# EAGLE board dual-verter (EAGLE 7.7.0)

Size 100 x 16.5 mm. Coordinates in mm from the lower left corner, seen from the top.
Outline: 0,0 100,0 100,16.5 0,16.5 0,0
Copper layers (1*16): Top 0.035mm / dielectric 1.5mm / Bottom 0.035mm
Design rules "default": minimum track width 10mil, minimum drill 24mil, track to track 8mil, track to pad 8mil, pad to pad 8mil, via to via 8mil, smd to smd 8mil, copper to edge 40mil, drill to drill 8mil, minimum pad ring 10mil, minimum via ring 8mil, stop-mask expansion 4mil, vias tented up to drill 0mil, thermal gap 10mil

## Footprints (pad centres in the part's own frame; a part is rotated, then mirrored left to right if it is on the bottom)
C0805 = smd 1.3 x 1.5: 1 -0.95,0; 2 0.95,0
SOD323-W = smd 1.5 x 1.2: A 1.45,0; C -1.45,0
SO08 = smd 0.6 x 2.2: 1 -1.905,-2.6; 2 -0.635,-2.6; 3 0.635,-2.6; 4 1.905,-2.6; 5 1.905,2.6; 6 0.635,2.6; 7 -0.635,2.6; 8 -1.905,2.6
WQP-PJ301M-12_JACK = drill 1.1: P$1_TIP 0,5; P$2_SWITCH 0,-3.5; P$3_SLEEVE 0,-6.5
POWER_10 = drill 1.016 pad 1.88 octagon: 1 -5.08,-1.27; 2 -5.08,1.27; 3 -2.54,-1.27; 4 -2.54,1.27; 5 0,-1.27; 6 0,1.27; 7 2.54,-1.27; 8 2.54,1.27; 9 5.08,-1.27; 10 5.08,1.27
R0805 = smd 1.3 x 1.5: 1 -0.95,0; 2 0.95,0
9MM_SNAP-IN_POT = drill 1.1 square: 1 -2.5,-7 | drill 1.1 octagon: 2 0,-7; 3 2.5,-7 | drill 2.1 pad 2.794: CHASSIS1 -4.5,0; CHASSIS2 4.5,0

## Placement (x,y rotation side)
C1  10u  [C0805]  90.17,2.54 0 bottom
C2  0.1u  [C0805]  90.17,6.35 0 bottom
C3  0.1u  [C0805]  90.17,10.16 180 bottom
C4  10u  [C0805]  90.17,13.97 180 bottom
D1  BAT54  [SOD323-W]  89.25,4.4 90 top
D2  BAT54  [SOD323-W]  89.44,12.09 90 top
IC1  TL072D  [SO08]  45.09,8.26 0 bottom
IN1  THONKICONNNEW  [WQP-PJ301M-12_JACK]  82.56,8.01 0 top
IN2  THONKICONNNEW  [WQP-PJ301M-12_JACK]  35.59,8.01 0 top
OUT1  THONKICONNNEW  [WQP-PJ301M-12_JACK]  54.62,8.01 0 top
OUT2  THONKICONNNEW  [WQP-PJ301M-12_JACK]  8.28,8.01 0 top
POWER1  POWER_SIMPLE10  [POWER_10]  96.52,8.26 270 bottom
R1  200k  [R0805]  36.2,8.26 90 bottom
R2  200k  [R0805]  41.91,14.61 180 bottom
R3  200k  [R0805]  45.09,1.91 180 bottom
R4  200k  [R0805]  29.21,13.97 180 bottom
R5  200k  [R0805]  8.26,8.26 270 bottom
R6  200k  [R0805]  53.34,8.26 90 bottom
R7  FERRITE  [R0805]  75.07,3.41 90 bottom
R8  FERRITE  [R0805]  75.06,12.97 90 bottom
VR1  100k  [9MM_SNAP-IN_POT]  68.58,8.26 270 top
VR2  100k  [9MM_SNAP-IN_POT]  22.86,7.62 270 top

## Library data of the parts
C1-C4 R1-R8 = rcl
D1 D2 = diode
IC1 = linear
IN1 IN2 OUT1 OUT2 VR1 VR2 = MusicThingModular
POWER1 = eurorack

## Nets
+12V: C1.1 C2.1 D1.C IC1.8 R7.2
-12V: C3.2 C4.2 D2.A IC1.4 R8.1
GND: C1.2 C2.2 C3.1 C4.1 D1.A D2.C IN1.P$2_SWITCH IN1.P$3_SLEEVE IN2.P$3_SLEEVE OUT1.P$2_SWITCH OUT1.P$3_SLEEVE OUT2.P$2_SWITCH OUT2.P$3_SLEEVE POWER1.3 POWER1.4 POWER1.5 POWER1.6 POWER1.7 POWER1.8 VR1.1 VR2.1
IN1: IN1.P$1_TIP IN2.P$2_SWITCH R1.1 VR1.3
N$1: IC1.3 VR1.2
N$2: IC1.5 VR2.2
N$3: IC1.7 R4.2 R5.1
N$4: IN2.P$1_TIP R2.1 VR2.3
N$5: IC1.1 R3.2 R6.1
N$6: IC1.2 R1.2 R3.1
N$7: POWER1.9 POWER1.10 R7.1
N$8: IC1.6 R2.2 R4.1
N$9: OUT2.P$1_TIP R5.2
N$10: OUT1.P$1_TIP R6.2
N$11: POWER1.1 POWER1.2 R8.2

## Tracks (layer width: path | path; a pad name or v marks a point on that pad's centre or on a via)
+12V  (4 unrouted)
-12V  (4 unrouted)
GND  (20 unrouted)
IN1  (3 unrouted)
N$1  (1 unrouted)
N$2  (1 unrouted)
N$3  (2 unrouted)
N$4  (2 unrouted)
N$5  (2 unrouted)
N$6  (2 unrouted)
N$7  (2 unrouted)
N$8  (2 unrouted)
N$9  (1 unrouted)
N$10  (1 unrouted)
N$11  (2 unrouted)

## Text on the board
tNames: DualVerter